# Altium PCB control_plane.PcbDoc
Units mil, origin at the board's own origin, x right, y up, seen from the top; angles counter-clockwise.
Board outline 3200 x 1597.36 mil, 4 copper layers (Top Layer, GND, VCC_3.3_MAIN, Bottom Layer), stack 58 mil thick; 101 components, 96 nets, 426 pads, 198 vias.
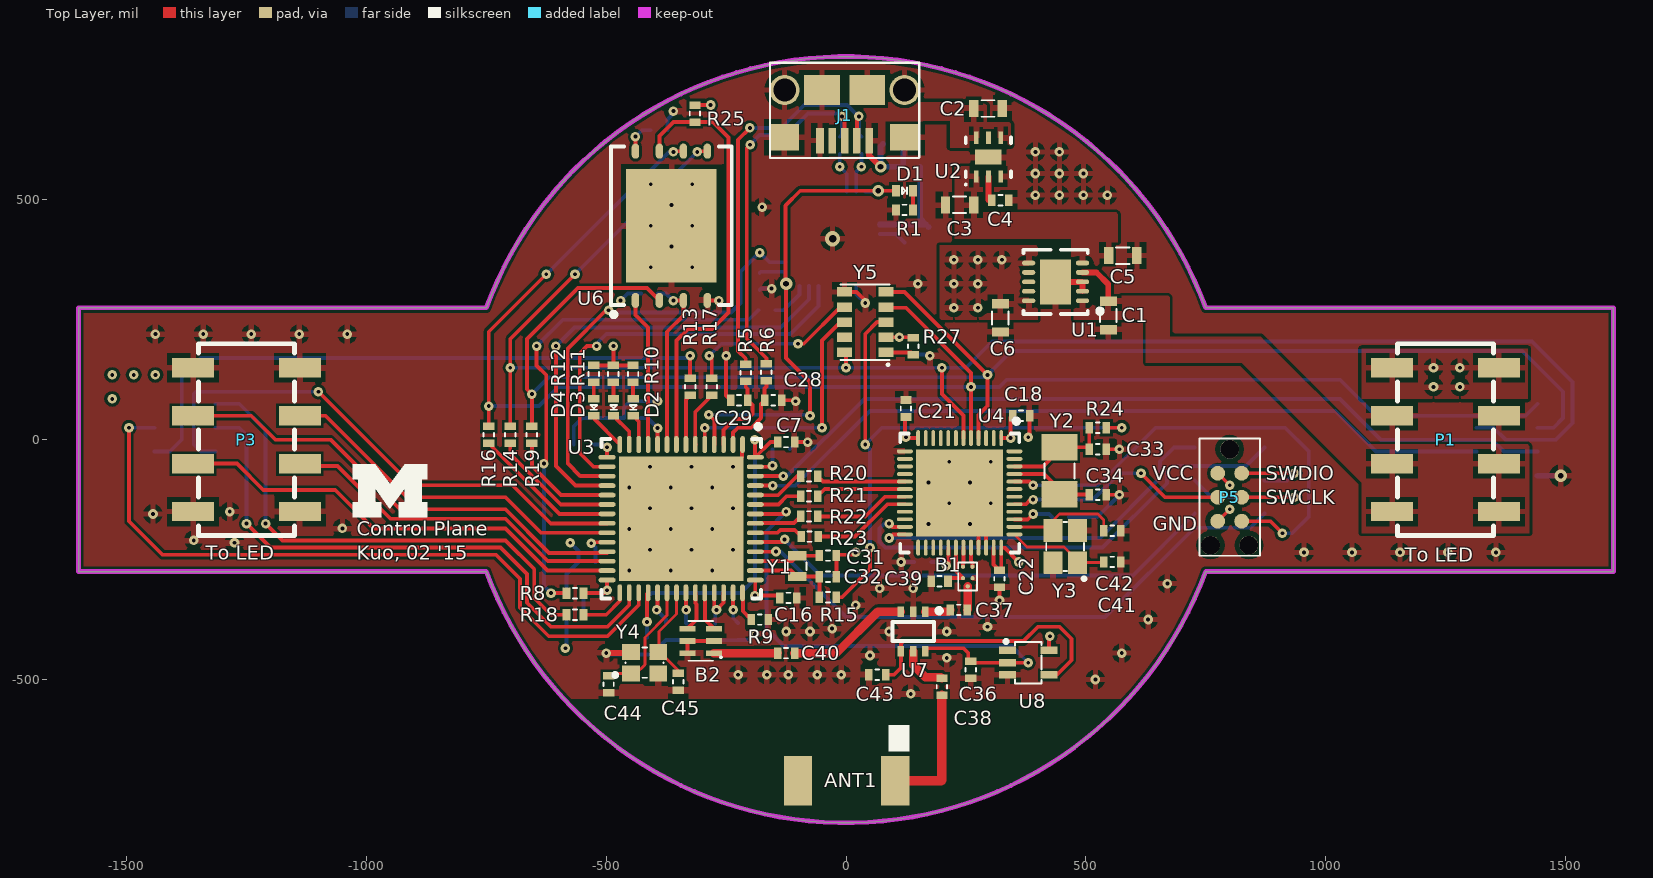
[diagram p0: Top Layer view]
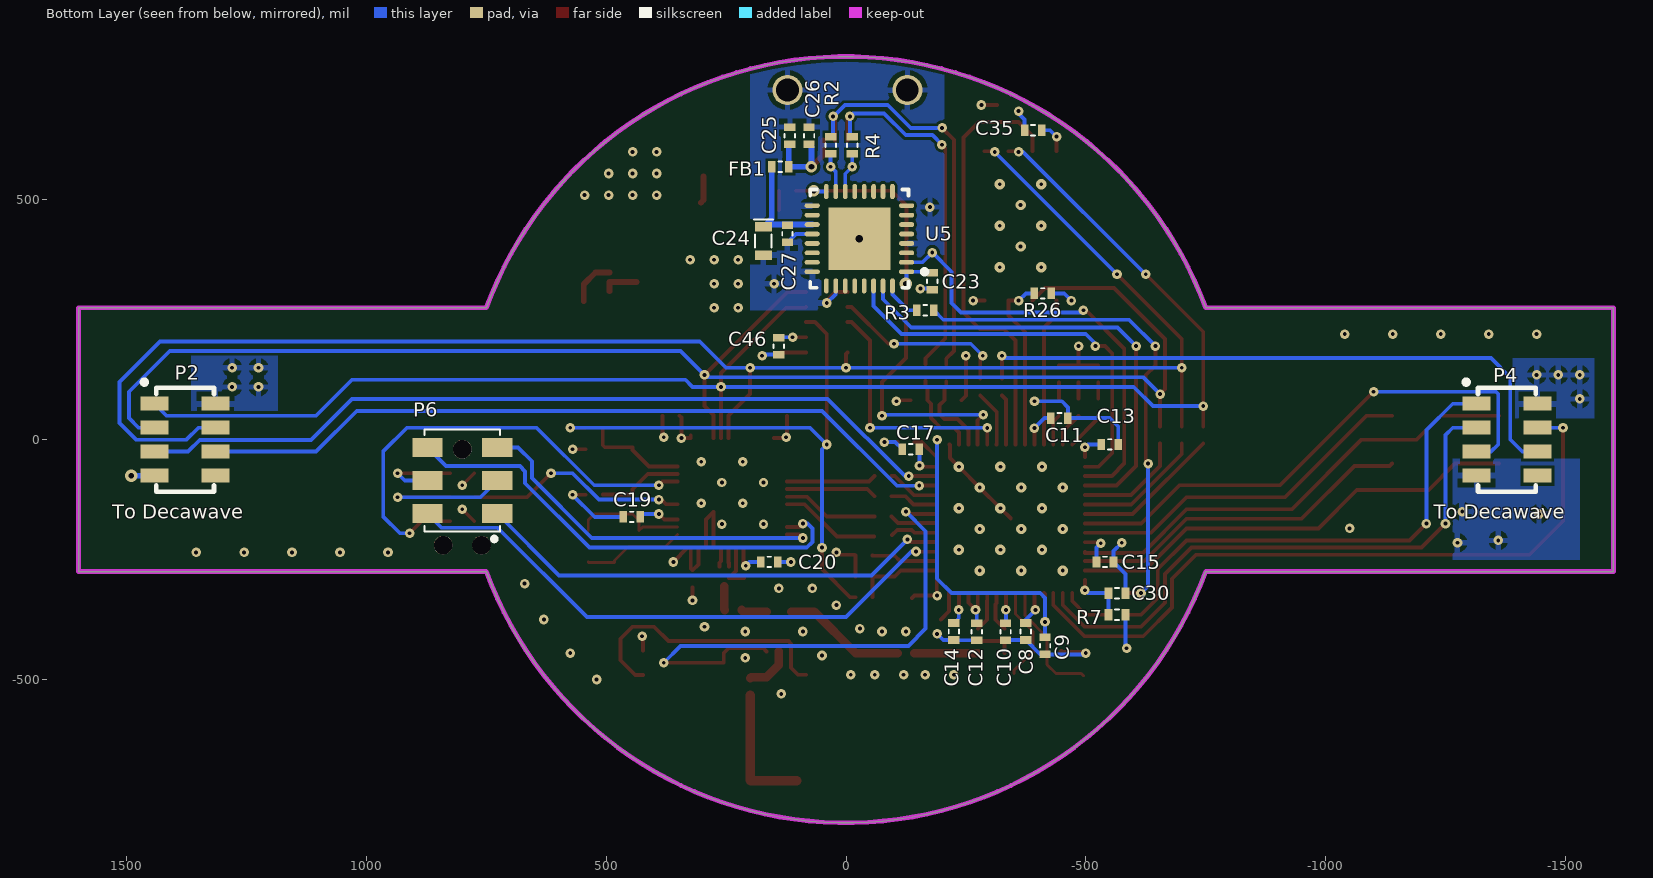
[diagram p1: Bottom Layer view, seen from below]
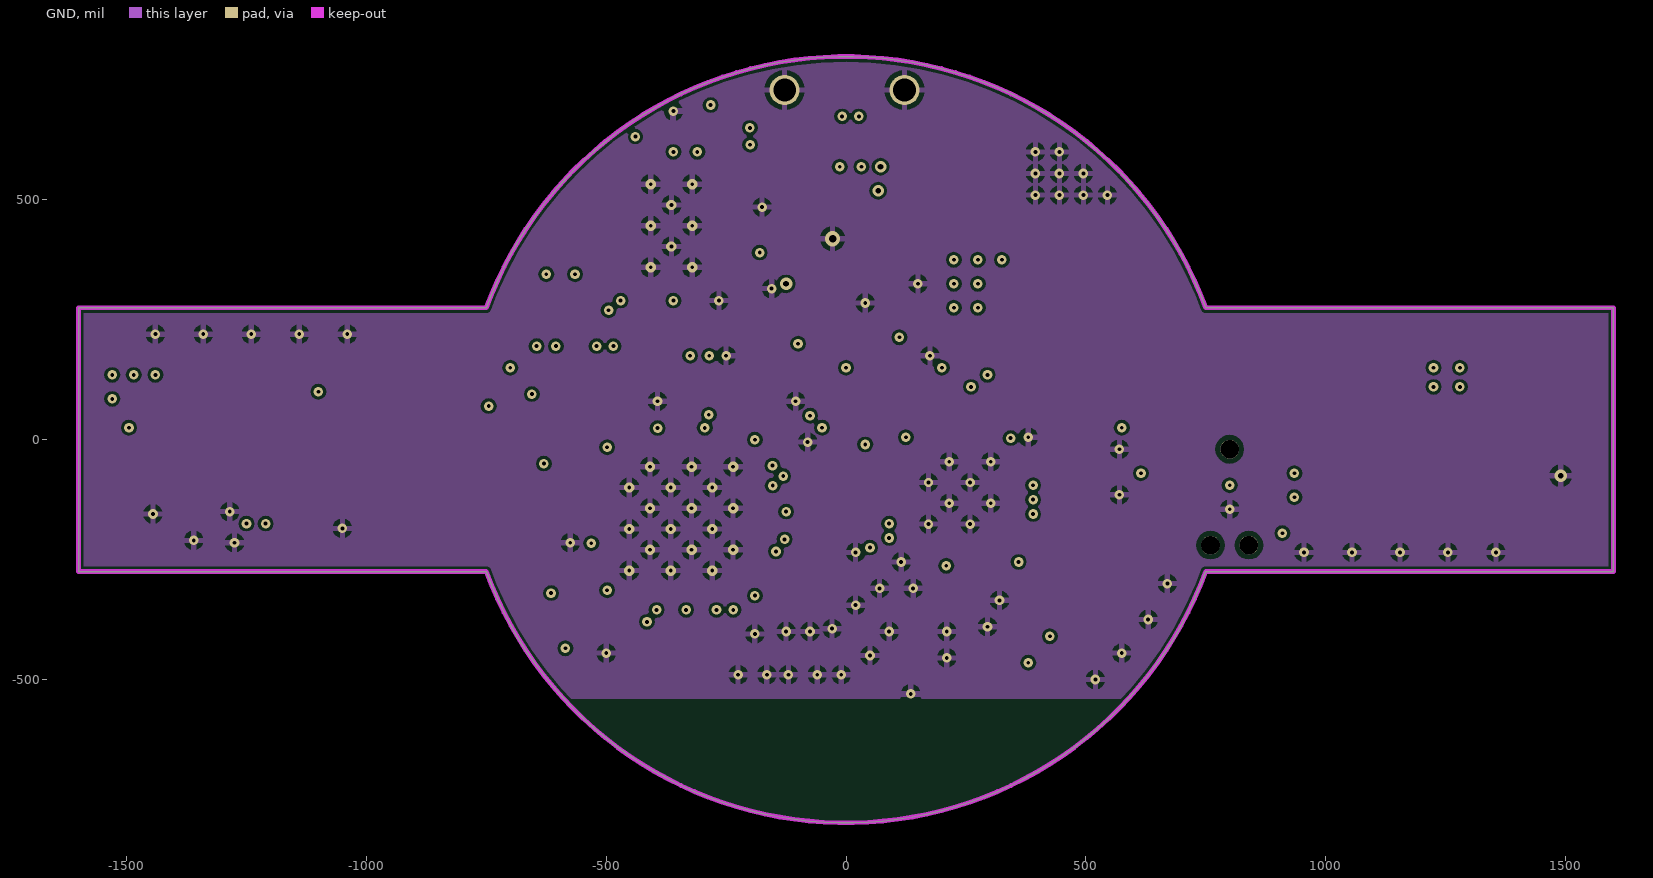
[diagram p2: GND]
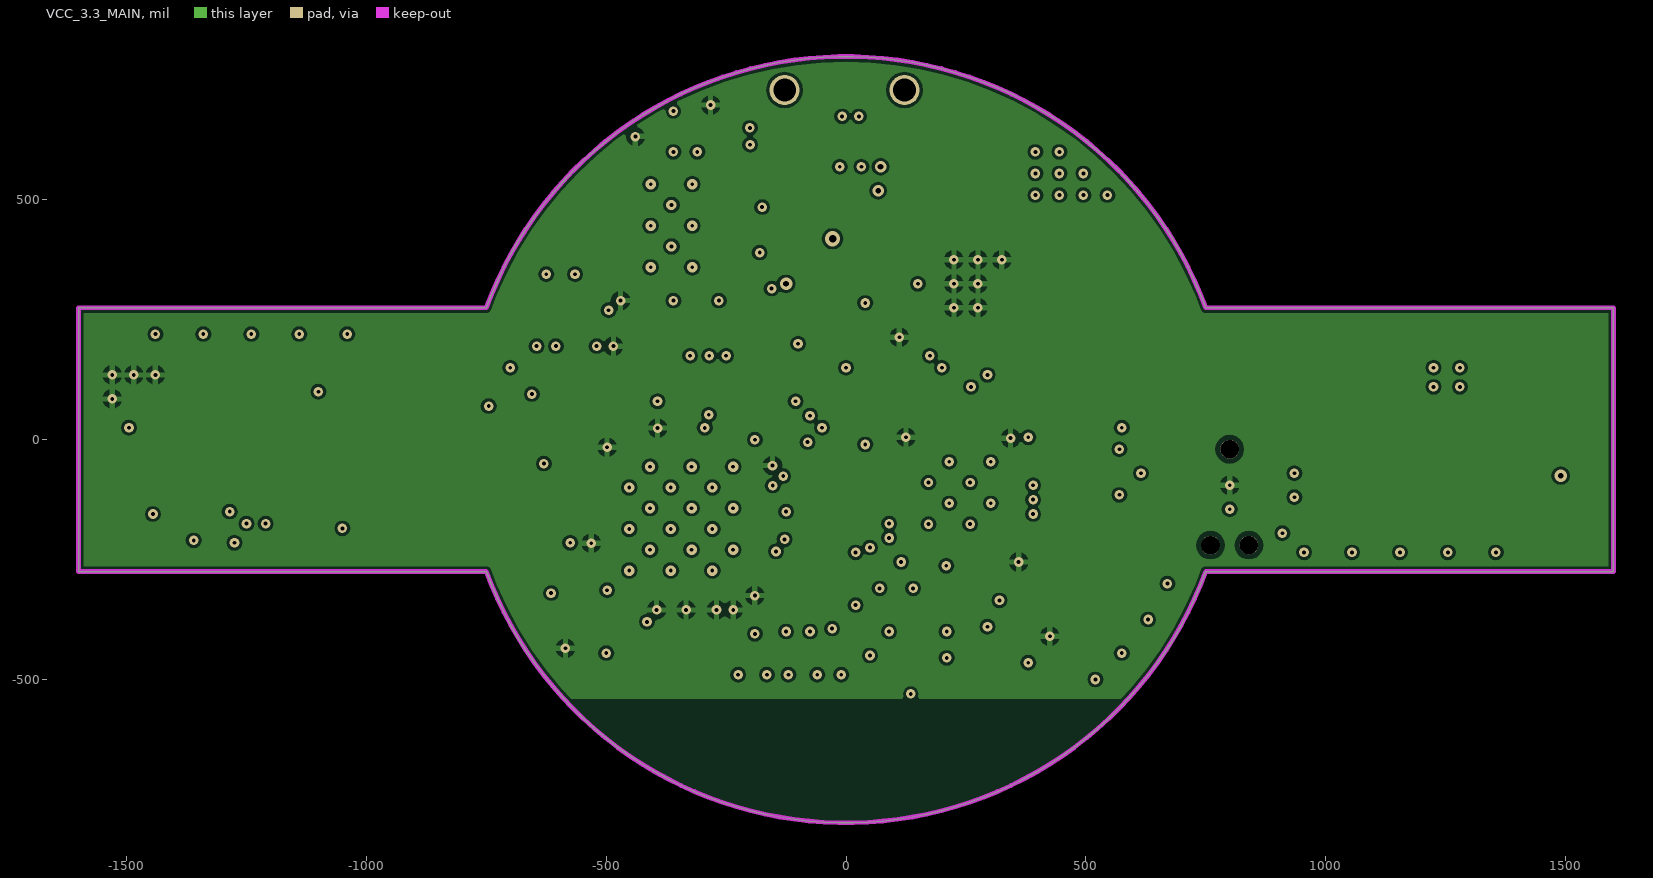
[diagram p3: VCC_3.3_MAIN]

## Layer stack, top to bottom
Top Solder: solder mask 0.4, Solder Resist, Dk 3.5
Top Layer: signal copper 1.7
Dielectric 1: core 11.9, FR-4, Dk 4.5
GND: signal copper 1.4
Dielectric 2: prepreg 28, Dk 4.5
VCC_3.3_MAIN: signal copper 1.4
Dielectric 3: core 11.9, Dk 4.5
Bottom Layer: signal copper 1.7
Bottom Solder: solder mask 0.4, Solder Resist, Dk 3.5

## Board outline
-1600,-275 -1600,275 -750,275 cw(c0,0) 750,275 1600,275 1600,-275 750,-275 cw(c0,0) -750,-275

## Design rules (kind name [scope] priority, off if disabled: settings)
Clearance "Clearance~Sunstone Circuits" [All] p1: gap=6 // Sunstone Circuits Minimum Clearance Rule (MLB~4&6 Layer Designs)
DiffPairsRouting [All] p1: maxlimit=10 minlimit=10 mostfreqgap=10 toplayer_minwidth=8 toplayer_maxwidth=15 toplayer_prefwidth=15 midlayer1_minwidth=15 midlayer1_maxwidth=15 midlayer1_prefwidth=15 midlayer2_minwidth=15 midlayer2_maxwidth=15 midlayer2_prefwidth=15 bottomlayer_minwidth=8 bottomlayer_maxwidth=15 bottomlayer_prefwidth=15 maxuncoupledlength=500
HoleSize "HoleSize~Sunstone Circuits" [All] p1: absolutevalues=TRUE maxlimit=251 minlimit=8 maxpercent=80.000 minpercent=20.000 // Sunstone Circuits Hole Size Rule (MLB~4&6 Layer Designs)
HoleSize Testpoint [All] p2: absolutevalues=TRUE maxlimit=100 minlimit=1 maxpercent=80.000 minpercent=20.000
HoleSize TestPointUsage [All] p3: absolutevalues=TRUE maxlimit=100 minlimit=1 maxpercent=80.000 minpercent=20.000
MinimumAnnularRing "MinimumAnnularRing~Sunstone Circuits" [All] p1: minimumring=6 // Sunstone Circuits Minimum Annular Ring (MLB~4&6 Layer Designs)
MinimumSolderMaskSliver [All] p1 off: minsoldermaskwidth=10
PlaneClearance "PlaneClearance~Sunstone Circuits" [All] p1: clearance=12 // Sunstone Circuits Power Plane Clearance Rule (MLB~4&6 Layer Designs)
PlaneConnect "PlaneConnect~Sunstone Circuits" [All] p1: planeconnectstyle=Relief reliefexpansion=10 reliefentries=4 reliefconductorwidth=8 reliefairgap=10 // Sunstone Circuits Power Plane Connect Rule (MLB~4&6 Layer Designs)
PolygonConnect "PolygonConnect~Sunstone Circuits" [All] p1: connectstyle=Relief reliefconductorwidth=12 reliefentries=4 polygonreliefangle="90 Angle" airgapwidth=10 // Sunstone Circuits Polygon Connect Style (MLB~4&6 Layer Designs)
RoomDefinition U_usb [InComponentClass('U_usb')] p1 off: confinementstyle=ConfineIn formatcopy=TRUE lockcomponents=FALSE outline -607.48,-393.7 -607.48,-291.3 -265.48,-291.3 -265.48,110.98 -237.7,110.98 -237.7,181.76 -208.7,181.76 -208.7,372.48 -183.67,372.48 -183.67,554.98 -174.42,554.98 -174.42,839 168.42,839 168.42,597.7 179.48,597.7 179.48,470.97 206.61,470.97 206.61,357.74 107.98,357.74 107.98,283.02 -109.52,283.02 -109.52,53.58 -137.52,53.58 -137.52,-403.7 -222.48,-403.7 -222.48,-393.7
RoomDefinition U_rtc [InComponentClass('U_rtc')] p2 off: confinementstyle=ConfineIn formatcopy=TRUE lockcomponents=FALSE outline -32.06,141.21 -32.06,335.71 112.05,335.71 112.05,237.48 168.7,237.48 168.7,152.52 112.05,152.52 112.05,141.21
RoomDefinition U_rf [InComponentClass('U_rf')] p3 off: confinementstyle=ConfineIn formatcopy=TRUE lockcomponents=FALSE outline -518.7,-552.48 -518.7,-467.52 -489.14,-467.52 -489.14,-408.74 -368.56,-408.74 -368.56,-357.49 79.8,-357.49 79.8,-330.94 152.52,-330.94 152.52,-266.3 222.19,-266.3 222.19,-244.17 398.72,-244.17 398.72,-152.91 515.28,-152.91 515.28,-161.3 597.48,-161.3 597.48,-283.7 515.28,-283.7 515.28,-306.9 456.93,-306.9 456.93,-524.21 228.7,-524.21 228.7,-557.48 152.06,-557.48 152.06,-782.1 -147.46,-782.1 -147.46,-552.48
RoomDefinition U_power [InComponentClass('U_power')] p4 off: confinementstyle=ConfineIn formatcopy=TRUE lockcomponents=FALSE outline -592.48,-38.7 -592.48,18.7 -536.72,18.7 -536.72,47.12 -487.48,47.12 -487.48,73.7 62.52,73.7 62.52,78.7 180.74,78.7 180.74,523.61 234.83,523.61 234.83,663.17 239.74,663.17 239.74,725.61 352.26,725.61 352.26,663.17 359.17,663.17 359.17,527.7 364.48,527.7 364.48,422.66 549.36,422.66 549.36,418.61 633.26,418.61 633.26,349.39 581.61,349.39 581.61,202.74 489.48,202.74 489.48,-189.7 388.73,-189.7 388.73,-262.73 348.7,-262.73 348.7,-332.48 -77.52,-332.48 -77.52,-358.7 -196.3,-358.7 -196.3,-442.48 -243.95,-442.48 -243.95,-443.13 -386.3,-443.13 -386.3,-472.48 -443.7,-472.48 -443.7,-357.72 -536.72,-357.72 -536.72,-283.7 -582.48,-283.7 -582.48,-38.7
RoomDefinition U_flash [InComponentClass('U_flash')] p5 off: confinementstyle=ConfineIn formatcopy=TRUE lockcomponents=FALSE outline -517.7,241.12 -517.7,639.07 -432.48,639.07 -432.48,673.7 -343.7,673.7 -343.7,722.48 -286.3,722.48 -286.3,639.07 -210.3,639.07 -210.3,241.12
RoomDefinition U_digital_IO [InComponentClass('U_digital_IO')] p6 off: confinementstyle=ConfineIn formatcopy=TRUE lockcomponents=FALSE outline -773.7,-32.48 -773.7,52.48 -554.7,52.48 -554.7,179.48 -415.3,179.48 -415.3,152.48 -251.3,152.48 -251.3,53.7 567.48,53.7 567.48,-143.7 495.4,-143.7 495.4,-154.77 4.83,-154.77 4.83,-357.35 -522.52,-357.35 -522.52,-393.7 -607.48,-393.7 -607.48,-32.48
RoomDefinition U_connector [InComponentClass('U_connector')] p7 off: confinementstyle=ConfineIn formatcopy=TRUE lockcomponents=FALSE outline -1483.52,-123.46 -1483.52,139.84 -1417.92,139.84 -1417.92,215 1417.92,215 1417.92,139.84 1483.52,139.84 1483.52,-123.46 1417.92,-123.46 1417.92,-215 917.33,-215 917.33,-225.98 874.96,-225.98 874.96,-254.02 725.04,-254.02 725.04,-225.98 682.67,-225.98 682.67,-215 -1417.92,-215 -1417.92,-123.46
RoutingVias "RoutingVias~Sunstone Circuits" [All] p1: holewidth=16 width=30 viastyle="Through Hole" minholewidth=8 minwidth=20 maxholewidth=20 maxwidth=40 // Sunstone Circuits Routing Vias Rule (MLB~4&6 Layer Designs)
ShortCircuit "ShortCircuit~Sunstone Circuits" [All] p1: allowed=FALSE // Sunstone Circuits Short Circuit Rule~Do Not Allow (MLB~4&6 Layer Designs)
SilkToSilkClearance [All] p1 off: silktosilkclearance=10
SilkToSolderMaskClearance [IsPad] p1 off: minsilkscreentomaskgap=10 clearancetoexposedcopper=TRUE
SolderMaskExpansion tentVias [isVia] p1: expansion=-20 // Sunstone Circuits Solder Mask Expansion Rule (MLB~4&6 Layer Designs)
SolderMaskExpansion "SolderMaskExpansion~Sunstone Circuits" [All] p2: expansion=3 // Sunstone Circuits Solder Mask Expansion Rule (MLB~4&6 Layer Designs)
ViasUnderSMD "ViasUnderSMD~Sunstone Circuits" [All] p1: allowed=FALSE // Sunstone Circuits Vias Under SMD~Do Not Allow (MLB~4&6 Layer Designs)
Width "Width~Sunstone Circuits" [All] p1: maxlimit=100 minlimit=6 preferedwidth=10 // Sunstone Circuits Minimum Width Rule (MLB~4&6 Layer Designs)
22 further rules are at their usual default settings.

## Classes and differential pairs
component class U_connector: P1 P2 P3 P4 P5 P6
component class U_digital_IO: C31 C32 C33 C34 D2 D3 D4 R10 R11 R12 R13 R14 R15 R16 R17 R18 R19 R20 R21 R22 R23 R24 Y1 Y2
component class U_flash: C35 R25 R26 U6
component class U_power: C1 C2 C3 C4 C5 C6 C7 C8 C9 C10 C11 C12 C13 C14 C15 C16 C17 C18 C19 C20 C21 C22 U1 U2 U3 U4
component class U_rf: ANT1 B1 B2 C36 C37 C38 C39 C40 C41 C42 C43 C44 C45 U7 U8 Y3 Y4
component class U_rtc: C46 R27 Y5
component class U_usb: C23 C24 C25 C26 C27 C28 C29 C30 D1 FB1 J1 R1 R2 R3 R4 R5 R6 R7 R8 R9 U5
differential pair CC2538_RF: +CC2538_RF_P -CC2538_RF_N
differential pair NRF51822_RF: +NRF51822_RF_P -NRF51822_RF_N
differential pair USB_FTDI: +USB_FTDI_P -USB_FTDI_N
differential pair USB_MCU: +USB_MCU_P -USB_MCU_N
differential pair USB: +USB_P -USB_N

## Components (designator, comment, footprint, x,y, rotation, side; value= is the part's Value field where it differs from the comment)
ANT1 "Ground Antenna" "Chip Antenna" 21,-716 r180 top
B1 "BAL-NRF01D3" BAL-NRF01D3 244,-265 r270 top
B2 "2450BM15A0002E" 2450BM15A0002 -302.65,-419.65 r180 top
C1 "Ceramic capacitor" 0603 547,259 r270 top
C2 "Ceramic capacitor" 0603 296,691 r0 top
C3 "Ceramic capacitor" 0603 237,489 r180 top
C4 "Ceramic capacitor" 0402 322,499 r0 top
C5 "Ceramic capacitor" 0603 577,384 r0 top
C6 "Ceramic capacitor" 0603 322,254 r270 top
C7 "Ceramic capacitor" 0402 -125,-5 r0 top
C8 "Ceramic capacitor" 0402 -375,-400 r270 bottom
C9 "Ceramic capacitor" 0402 -415,-430 r270 bottom
C10 "Ceramic capacitor" 0402 -332.65,-400.65 r270 bottom
C11 "Ceramic capacitor" 0402 -445,45 r180 bottom
C12 "Ceramic capacitor" 0402 -272.65,-400.65 r270 bottom
C13 "Ceramic capacitor" 0402 -550,-10 r180 bottom
C14 "Ceramic capacitor" 0402 -225,-400 r270 bottom
C15 "Ceramic capacitor" 0402 -540,-255 r180 bottom
C16 "Ceramic capacitor" 0402 -120,-330 r0 top
C17 "Ceramic capacitor" 0402 -135,-20 r0 bottom
C18 "Ceramic capacitor" 0402 365,50 r0 top
C19 "Ceramic capacitor" 0402 447,-161 r0 bottom
C20 "Ceramic capacitor" 0402 160,-255 r180 bottom
C21 "Ceramic capacitor" 0402 125,65 r90 top
C22 "Ceramic capacitor" 0402 320,-290 r270 top
C23 "Ceramic capacitor" 0402 -180,330 r270 bottom
C24 "Tantalum capacitor" "0603 - Polar Marking" 172,414 r270 bottom
C25 "Ceramic capacitor" 0402 117,634 r90 bottom
C26 "Ceramic capacitor" 0402 77,634 r90 bottom
C27 "Ceramic capacitor" 0402 122,429 r270 bottom
C28 "Ceramic capacitor" 0402 -152,82.28 r0 top
C29 "Ceramic capacitor" 0402 -223,82.28 r180 top
C30 "Ceramic capacitor" 0402 -565,-320 r180 bottom
C31 "Ceramic capacitor" 0402 -37.65,-241.65 r0 top
C32 "Ceramic capacitor" 0402 -37.65,-285.65 r0 top
C33 "Ceramic capacitor" 0402 525,-20 r0 top
C34 "Ceramic capacitor" 0402 525,-115 r0 top
C35 "Ceramic capacitor" 0402 -390,645 r0 bottom
C36 "Ceramic capacitor" 0402 260,-480 r90 top
C37 "Ceramic capacitor" 0402 235,-355 r180 top
C38 "Ceramic capacitor" 0402 200,-515 r270 top
C39 "Ceramic capacitor" 0402 195,-295 r180 top
C40 "Ceramic capacitor" 0402 -125,-445 r0 top
C41 "Ceramic capacitor" 0402 555,-255 r180 top
C42 "Ceramic capacitor" 0402 555,-190 r180 top
C43 "Ceramic capacitor" 0402 65,-490 r180 top
C44 "Ceramic capacitor" 0402 -495,-510 r90 top
C45 "Ceramic capacitor" 0402 -350,-505 r90 top
C46 "Ceramic capacitor" 0402 140,195 r270 bottom
D1 "LED, Green" "0402 - DIODE" 122,519 r0 top
D2 "LED, Orange" "0402 - DIODE" -443.65,67.35 r270 top
D3 "LED, Red" "0402 - DIODE" -484.65,67.35 r270 top
D4 "LED, Green" "0402 - DIODE" -525.65,67.35 r270 top
FB1 "Ferrite Bead" 0402 137,569 r180 bottom
J1 "micro USB-B" "Micro USB-B" -3,729 r180 top
P1 "SSM-104-F-DV" SSM-104-F-DV 1250,0 r270 top locked
P2 "CLP Header" SAM_CLP_2_4 1378,0 r180 bottom
P3 "SSM-104-F-DV" SSM-104-F-DV -1250,0 r270 top locked
P4 "CLP Header" SAM_CLP_2_4 -1378,0 r180 bottom locked
P5 "TC2030" TC2030-IDC-NLFP 800,-120 r270 top
P6 "CAS-220" CAS-220A 800,-85 r90 bottom
R1 "Chip resistor" 0402 122,479 r180 top
R2 "Chip resistor" 0402 32,614 r90 bottom
R3 "Chip resistor" 0402 -165,270 r180 bottom
R4 "Chip resistor" 0402 -13,614 r90 bottom
R5 "Chip resistor" 0402 -209,139.28 r270 top
R6 "Chip resistor" 0402 -166,140.28 r270 top
R7 "Chip resistor" 0402 -565,-365 r0 bottom
R8 "Chip resistor" 0402 -565,-320 r180 top
R9 "Chip resistor" 0402 -180,-375 r0 top
R10 "Chip resistor" 0402 -444,137 r270 top
R11 "Chip resistor" 0402 -485,137 r270 top
R12 "Chip resistor" 0402 -526,137 r270 top
R13 "Chip resistor" 0402 -325,110 r270 top
R14 "Chip resistor" 0402 -700,10 r270 top
R15 "Chip resistor" 0402 -37.65,-328.65 r0 top
R16 "Chip resistor" 0402 -745,10 r270 top
R17 "Chip resistor" 0402 -280,110 r270 top
R18 "Chip resistor" 0402 -565,-365 r180 top
R19 "Chip resistor" 0402 -655,10 r270 top
R20 "Chip resistor" 0402 -77,-76 r0 top
R21 "Chip resistor" 0402 -77,-118 r0 top
R22 "Chip resistor" 0402 -77,-160 r0 top
R23 "Chip resistor" 0402 -76,-202 r0 top
R24 "Chip resistor" 0402 525,25 r0 top
R25 "Chip resistor" 0402 -315,680 r270 top
R26 "Chip resistor" 0402 -410,305 r0 bottom
R27 "Chip resistor" 0402 140,195 r270 top
U1 "LTC4413" DFN-10 437,329 r180 top
U2 "TPS73533" SON-6 297,589 r90 top
U3 "CC2538" QFN56 -343.65,-164.65 r270 top
U4 "nRF51822" QFN-48 237,-111 r270 top
U5 "FT232RQ" QFN-32 -28,419 r0 bottom
U6 "SST25VF064C" WSON -364,446 r90 top
U7 "uPG2214TB" minimold-6 140,-400 r270 top
U8 "SN74AUP1T14" "SC-70-5 (DCK)" 380,-465 r270 top
Y1 "ABS05" ABS05 -101.65,-263.65 r90 top
Y2 "ECX-31B" ECX-31B 445,-65 r90 top
Y3 "CSX2520" CX2520 457,-223 r90 top
Y4 "FA-128" FA-128 -420,-465 r0 top
Y5 "RV-3049-C3" RV-3049-C3 40,245 r90 top

## Footprints (in the part's own frame and the unit in brackets; to place one, negate y for a bottom-side part, rotate by r counter-clockwise, add the part's x,y. Pads: shape width x height; smd on the part's side, far side on the other; paste and mask are expansions set on the pad)
0402 [mm] "2-Leads, Body 1.00x0.50mm, IPC Medium Density"
  rect 0.4x0.6 smd: 1(-0.45,0) 2(0.45,0)
  silkscreen extent -0.1,-0.28 0.1,0.28, body extent -0.53,-0.28 0.53,0.27, height 0.4
"0402 - DIODE" [mm] "2-Leads, Body 1.00x0.50mm, IPC Medium Density"
  rect 0.4x0.6 smd: 1(-0.45,0) 2(0.45,0)
  silkscreen extent -0.13,-0.18 0.13,0.18, body extent -0.53,-0.28 0.53,0.27, height 0.4
0603 [mm] "2-Leads, Body 1.55x0.85mm, IPC Medium Density"
  rect 0.5x0.9 smd: 1(-0.75,0) 2(0.75,0)
  silkscreen extent -0.35,-0.45 0.35,0.43, body extent -0.75,-0.42 0.75,0.43, height 0.5
"0603 - Polar Marking" [mm] "2-Leads, Body 1.55x0.85mm, IPC Medium Density"
  rect 0.5x0.9 smd: 1(-0.75,0) 2(0.75,0)
  silkscreen extent -1.14,-0.51 0.35,0.51, body extent -0.75,-0.42 0.75,0.43, height 0.5
2450BM15A0002 [mm] "Chip Array, Flat, 6-Leads, Pitch 0.65mm,  Body 2.00x1.25mm,  IPC Medium Density"
  rect 0.85x0.3 smd: 1(-0.7,0.65) 2(-0.7,0) 3(-0.7,-0.65) 4(0.7,-0.65) 5(0.7,0) 6(0.7,0.65)
  silkscreen extent -1.11,-1.05 0.65,1.05, body extent -0.67,-1.05 0.67,1.05, height 0.81
ABS05 [mm] "ABS05 Crystal"
  rect 0.5x1 smd: 1(-0.55,0) 2(0.55,0)
  silkscreen extent -0.2,-0.5 0.2,0.5, body extent -0.8,-0.5 0.8,0.5, height 0.5
BAL-NRF01D3 [mm] "ST electronic balun"
  round 0.22 smd mask+0.05: A2(0.6,0.5) A3(0,0.5) B1(1.033,0.25) C2(0.6,0) C3(0,0)
  silkscreen extent -0.23,-0.25 1.25,0.75, body extent -0.23,-0.25 1.25,0.75, height 0.63
CAS-220A [mm] "CAS-220A"
  rect 1x1.6 smd: 1(-1.75,-1.85) 2(0,-1.85) 3(1.75,-1.85) 4(1.75,1.85) 5(0,1.85) 6(-1.75,1.85)
  silkscreen extent -3.2,-2 2.7,2, body extent -2.7,-2 2.7,2, height 2.5
"Chip Antenna" [mm] "FR05-S1-N-0-102"
  rect 1.5x2.6 smd: 1(-2.075,-0.125) ""(3.075,-0.125)
  silkscreen extent -2.83,-3.08 -1.73,-1.68, body extent -3.03,-1.63 3.98,1.38, height 2.2
CX2520 [mm] "Kyocera CX2520 crystal"
  rect 1.2x1 smd: 1(-0.85,-0.65) 2(0.85,-0.65) 3(0.85,0.65) 4(-0.85,0.65)
  silkscreen extent -1.75,-1.05 1.3,1, body extent -1.3,-1 1.3,1, height 0.5
DFN-10 [mm] "QFN, 10-Leads, Body 3.00x3.00mm, Pitch 0.50mm, Thermal Pad 1.65x2.38mm, IPC Medium Density"
  oval 0.7x0.25 smd: 1(-1.425,1) 2(-1.425,0.5) 3(-1.425,0) 4(-1.425,-0.5) 5(-1.425,-1) 6(1.425,-1) 7(1.425,-0.5) 8(1.425,0) 9(1.425,0.5) 10(1.425,1)
  rect 1.65x2.38 smd: 11(0,0)
  silkscreen extent -2.48,-1.7 1.7,1.7, body extent -1.55,-1.55 1.55,1.55, height 0.75
ECX-31B [mm] "ECX-31B"
  rect 1.4x1.9 smd: 1(-1.25,0) 2(1.25,0)
  silkscreen extent -0.4,-0.8 0.4,0.8, body extent -1.6,-0.8 1.6,0.8, height 0.9
FA-128 [mm] "Seiko Epson FA-128 Crystal"
  rect 0.95x0.85 smd: 1(-0.725,-0.575) 2(0.725,-0.575) 3(0.725,0.575) 4(-0.725,0.575)
  silkscreen extent -1.63,-0.8 1,0.8, body extent -1,-0.8 1,0.8, height 0.5
"Micro USB-B" [mm]
  rect 0.4x1.35 smd mask+0.1: 1(-1.3,2.675) 2(-0.65,2.675) 3(0,2.675) 4(0.65,2.675) 5(1.3,2.675)
  rect 1.6x1.4 smd mask+0.1: 6(-3.2,2.5) 6(3.2,2.5)
  round 1.6 hole 1.2: 6(-3.175,0) 6(3.175,0)
  rect 1.9x1.6 smd mask+0.1: 6(-1.2,0) 6(1.2,0)
  silkscreen extent -3.95,-1.45 3.95,3.6, body extent -4.1,-2.54 4.1,2.89, height 2.68
minimold-6 [mm] "SOTFL, 6-Leads, Body 2.00x2.10mm, Pitch 0.65mm, IPC Medium Density"
  rect 0.55x0.35 smd: 1(-1.05,0.65) 2(-1.05,0) 3(-1.05,-0.65) 4(1.05,-0.65) 5(1.05,0) 6(1.05,0.65)
  silkscreen extent -1.22,-1.1 0.5,1.5, body extent -0.67,-1.1 0.67,1.1, height 1
QFN56 [mm] "QFN, 56-Leads, Body 8.00x8.00mm, Pitch 0.50mm, Thermal Pad 6.60x6.60mm, IPC Medium Density"
  oval 0.9x0.25 smd: 1(-3.925,3.25) 2(-3.925,2.75) 3(-3.925,2.25) 4(-3.925,1.75) 5(-3.925,1.25) 6(-3.925,0.75) 7(-3.925,0.25) 8(-3.925,-0.25) 9(-3.925,-0.75) 10(-3.925,-1.25) 11(-3.925,-1.75) 12(-3.925,-2.25) 13(-3.925,-2.75) 14(-3.925,-3.25) 29(3.925,-3.25) 30(3.925,-2.75) 31(3.925,-2.25) 32(3.925,-1.75) 33(3.925,-1.25) 34(3.925,-0.75) 35(3.925,-0.25) 36(3.925,0.25) 37(3.925,0.75) 38(3.925,1.25) 39(3.925,1.75) 40(3.925,2.25) 41(3.925,2.75) 42(3.925,3.25)
  oval 0.25x0.9 smd: 15(-3.25,-3.925) 16(-2.75,-3.925) 17(-2.25,-3.925) 18(-1.75,-3.925) 19(-1.25,-3.925) 20(-0.75,-3.925) 21(-0.25,-3.925) 22(0.25,-3.925) 23(0.75,-3.925) 24(1.25,-3.925) 25(1.75,-3.925) 26(2.25,-3.925) 27(2.75,-3.925) 28(3.25,-3.925) 43(3.25,3.925) 44(2.75,3.925) 45(2.25,3.925) 46(1.75,3.925) 47(1.25,3.925) 48(0.75,3.925) 49(0.25,3.925) 50(-0.25,3.925) 51(-0.75,3.925) 52(-1.25,3.925) 53(-1.75,3.925) 54(-2.25,3.925) 55(-2.75,3.925) 56(-3.25,3.925)
  rect 6.6x6.6 smd: 57(0,0)
  silkscreen extent -5,-4.22 4.22,4.23, body extent -4.08,-4.07 4.07,4.08, height 1
QFN-32 [mm] "32-Pin QFN 0.5 mm Pitch"
  oval 0.8x0.25 smd: 1(-2.5,1.75) 2(-2.5,1.25) 3(-2.5,0.75) 4(-2.5,0.25) 5(-2.5,-0.25) 6(-2.5,-0.75) 7(-2.5,-1.25) 8(-2.5,-1.75) 17(2.5,-1.75) 18(2.5,-1.25) 19(2.5,-0.75) 20(2.5,-0.25) 21(2.5,0.25) 22(2.5,0.75) 23(2.5,1.25) 24(2.5,1.75)
  oval 0.25x0.8 smd: 9(-1.75,-2.5) 10(-1.25,-2.5) 11(-0.75,-2.5) 12(-0.25,-2.5) 13(0.25,-2.5) 14(0.75,-2.5) 15(1.25,-2.5) 16(1.75,-2.5) 25(1.75,2.5) 26(1.25,2.5) 27(0.75,2.5) 28(0.25,2.5) 29(-0.25,2.5) 30(-0.75,2.5) 31(-1.25,2.5) 32(-1.75,2.5)
  rect 3.3x3.3 smd: 33(0,0)
  silkscreen extent -3.57,-2.6 2.6,2.6, body extent -2.58,-2.58 2.58,2.58, height 0.8
QFN-48 [mm] "QFN, 48-Leads, Body 6.00x6.00mm, Pitch 0.40mm, Thermal Pad 4.60x4.60mm, IPC Medium Density"
  oval 0.85x0.2 smd: 1(-2.9,2.2) 2(-2.9,1.8) 3(-2.9,1.4) 4(-2.9,1) 5(-2.9,0.6) 6(-2.9,0.2) 7(-2.9,-0.2) 8(-2.9,-0.6) 9(-2.9,-1) 10(-2.9,-1.4) 11(-2.9,-1.8) 12(-2.9,-2.2) 25(2.9,-2.2) 26(2.9,-1.8) 27(2.9,-1.4) 28(2.9,-1) 29(2.9,-0.6) 30(2.9,-0.2) 31(2.9,0.2) 32(2.9,0.6) 33(2.9,1) 34(2.9,1.4) 35(2.9,1.8) 36(2.9,2.2)
  oval 0.2x0.85 smd: 13(-2.2,-2.9) 14(-1.8,-2.9) 15(-1.4,-2.9) 16(-1,-2.9) 17(-0.6,-2.9) 18(-0.2,-2.9) 19(0.2,-2.9) 20(0.6,-2.9) 21(1,-2.9) 22(1.4,-2.9) 23(1.8,-2.9) 24(2.2,-2.9) 37(2.2,2.9) 38(1.8,2.9) 39(1.4,2.9) 40(1,2.9) 41(0.6,2.9) 42(0.2,2.9) 43(-0.2,2.9) 44(-0.6,2.9) 45(-1,2.9) 46(-1.4,2.9) 47(-1.8,2.9) 48(-2.2,2.9)
  rect 4.6x4.6 smd: 49(0,0)
  silkscreen extent -3.92,-3.15 3.15,3.15, body extent -3,-3 3,3, height 0.9
RV-3049-C3 [mm] "RV-3049-C3"
  rect 0.5x0.8 smd: 1(-1.6,-1.1) 2(-0.8,-1.1) 3(0,-1.1) 4(0.8,-1.1) 5(1.6,-1.1) 6(1.6,1.1) 7(0.8,1.1) 8(0,1.1) 9(-0.8,1.1) 10(-1.6,1.1)
  silkscreen extent -2.26,-1.3 2,1.3, body extent -1.9,-1.3 1.9,1.3, height 0.9
SAM_CLP_2_4 [mm]
  rect 1.47x0.74 smd: 1(-1.615,1.905) 2(1.615,1.905) 3(-1.615,0.635) 4(1.615,0.635) 5(-1.615,-0.635) 6(1.615,-0.635) 7(-1.615,-1.905) 8(1.615,-1.905)
  silkscreen extent -2.28,-2.76 1.53,3.17, body extent -1.53,-2.76 1.53,2.76, height 2.29
"SC-70-5 (DCK)" [mm]
  rect 0.4x0.9 smd mask+0.05: 1(-0.65,-1.1) 2(0,-1.1) 3(0.65,-1.1) 4(0.65,1.1) 5(-0.65,1.1)
  silkscreen extent -1.18,-1.23 1.1,0.7, body extent -1.1,-0.7 1.1,0.7, height 1.1
SON-6 [mm] "SON, 6-Leads, Body 2.00x2.00mm, Pitch 0.65mm, Thermal Pad 1.60x0.89mm, IPC Medium Density"
  rect 0.65x0.25 smd: 1(-1.025,0.65) 2(-1.025,0) 3(-1.025,-0.65) 4(1.025,-0.65) 5(1.025,0) 6(1.025,0.65)
  rect 0.8x1.4 smd: 7(0,0)
  silkscreen extent -1.5,-1.2 1.05,1.25, body extent -1.05,-1.05 1.05,1.05, height 0.8
SSM-104-F-DV [mm] "Samtec 100 mil 2x4 female connector"
  rect 1.02x2.22 smd: 1(-3.81,-2.825) 2(-3.81,2.825) 3(-1.27,-2.825) 4(-1.27,2.825) 5(1.27,-2.825) 6(1.27,2.825) 7(3.81,-2.825) 8(3.81,2.825)
  silkscreen extent -5.08,-2.54 5.08,2.54, body extent -5.08,-2.54 5.08,2.54, height 7.37
TC2030-IDC-NLFP [mil]
  round 39 hole 39 unplated: 0(-100,0) 0(100,40) 0(100,-40)
  round 31 smd paste-196.85: 1(-50,-25) 2(-50,25) 3(0,-25) 4(0,25) 5(50,-25) 6(50,25)
  Top Layer pour cut-out: -50,25 -50,-25 50,-25 50,25
  silkscreen extent -122,-63 122,63
WSON [mm] "QFN, 8-Leads, Body 8.00x6.00mm, Pitch 1.27mm, Thermal Pad 6.00x4.80mm, IPC Medium Density"
  oval 0.8x0.4 smd: 1(-3.95,1.905) 2(-3.95,0.635) 3(-3.95,-0.635) 4(-3.95,-1.905) 5(3.95,-1.905) 6(3.95,-0.635) 7(3.95,0.635) 8(3.95,1.905)
  rect 6x4.8 smd: 9(0,0)
  silkscreen extent -4.82,-3.2 4.2,3.2, body extent -4.05,-3.05 4.05,3.05, height 0.8

## Part data
ANT1: "2.4GHz Surface Mount Device (SMD) On Ground Antenna, 50 Ohms"
B1: "50 ohm nominal input / conjugate match balun to nRF51822-CEAA"
B2: "2.45 GHz Balun for TI CC253X"
C1 C3 C5: library part C_4.7u_10V_0603_ceramic, "Ceramic capacitor, 4.7u, 10V, 0603 package"
C2: library part C_1u_16V_0603_ceramic, "Ceramic capacitor, 1 uF, 16 V, 0603 package"
C4: library part C_10000p_16V_0402_ceramic, "Ceramic capacitor, 10000 pF, 16 V, 0402 package"
C6: library part C_10u_16V_0603_ceramic, "Ceramic capacitor, 10 uF, 16 V, 0603 package"
C7 C9 C17 C25: library part C_1u_16V_0402_ceramic, "Ceramic capacitor, 1 uF, 16V, 0402 package"
C8 C10 C11 C12 C13 C15 C16 C18 C19 C21 C23 C26 C27 C35 C46: library part C_0.1u_10V_0402_ceramic, "Ceramic capacitor, 0.1u, 0402 package"
C14: library part C_220p_50V_0402_ceramic, "Ceramic capacitor, 220 pF, 0402 package"
C20: library part C_0.047u_16V_0402_ceramic, "Ceramic capacitor, 0.047u, 16V, 0402 package"
C22 C30 C36 C43: library part C_1000p_50V_0402_ceramic, "Ceramic capacitor, 1000 pF, 0402 package"
C24: library part C_4.7u_10V_0603_tantalum, "Tantalum capacitor, 4.7 uF, 0603 package"
C28 C29: library part C_47p_0402_ceramic, "Ceramic capacitor, 47 pF, 0402 package"
C31 C32: library part C_22p_0402_ceramic, "Ceramic capacitor, 22 pF, 0402 package"
C33 C34: library part C_13p_0402_50V_ceramic, "Ceramic capacitor, 13 pF, 50 V, 0402 package"
C37 C38 C40: library part C_100p_25V_0402_ceramic, "Ceramic capacitor, 100 pF, 0402 package"
C39: library part C_2200p_50V_0402_ceramic, "Ceramic capacitor, 2200 pF, 0402 package"
C41 C42 C44 C45: library part C_12p_0402_ceramic, "Ceramic capacitor, 12 pF, 0402 package"
D1 D4: library part D_LED_GREEN_0402, "LED, Green,  0402"
D2: library part D_LED_ORANGE_0402, "LED, Orange, 0402"
D3: library part D_LED_RED_0402, "LED, Red, 0402"
FB1: library part FB_150mA_0402, "Ferrite Bead, 150 mA, 0402 package"
J1: library part "Micro USB", "CONN USB MICRO B RECPT SMT R/A"
P1 P3: "Samtec 2x4 100 mil female connector"
P2 P4: "Samtec CLP 2x4 0.05\" Female Header"
P5: "TC2030-MCP-NL"
P6: "DPDT dip switch"
R1 R12: library part R_205_0402, "Chip resistor, 205, 0402 package"
R2 R3 R4 R15 R24: library part R_0_0402, "Chip resistor, 0, 0402 package"
R5 R6: library part R_33_0402, "Chip resistor, 33, 0402 package"
R7 R25 R26: library part R_100K_0402, "Chip resistor, 100K, 0402 package"
R8: library part R_2.2K_0402, "Chip resistor, 2.2K, 0402 package"
R9: library part R_56K_0402, "Chip resistor, 56K, 0402 package"
R10: library part R_270_0402, "Chip resistor, 270, 0402 package"
R11: library part R_374_0402, "Chip resistor, 374, 0402 package"
R13 R14 R16 R17 R18 R19 R20 R21 R22 R23: library part R_100_0402, "Chip resistor, 100, 0402 package"
R27: library part R_10K_0402, "Chip resistor, 10K, 0402 package"
U1: "Dual 2.6A, 2.5V to 5.5V,  Ideal Diodes in 3mm × 3mm DFN"
U2: "500mA, Low Quiescent Current, Ultra-Low Noise, High PSRR  Low-Dropout Linear Regulator"
U3: "A Powerful System-On-Chip for 2.4-GHz IEEE 802.15.4, 6LoWPAN  and ZigBee Applications"
U4: "Multiprotocol Bluetooth® low energy/2.4 GHz RF System on Chip"
U5: "FT232R USB UART"
U6: "64 Mbit SPI Serial Dual I/O Flash"
U7: "GaAs Integrated Circuit for L, S-Band SPDT Switch"
U8: "LOW POWER, 1.8/2.5/3.3-V INPUT, 3.3-V CMOS OUTPUT, SINGLE  SCHMITT-TRIGGER INVERTER GATE"
Y1: "32768 Hz SMD Low profile crystal"
Y2: "SMD TUNING FORK CRYSTAL"
Y3: "Crystal oscillator"
Y4: "MHz Range Crystal Unit"
Y5: "Real Time Clock Module with SPI-Bus"

## Via types
v1: diameter 20, hole 8, Top Layer to Bottom Layer, 159 vias
v2: diameter 21.65, hole 7.87, Top Layer to Bottom Layer, 26 vias
v3: diameter 19.68, hole 7.87, Top Layer to Bottom Layer, 8 vias
v4: diameter 26, hole 12, Top Layer to Bottom Layer, 2 vias
v5: diameter 24, hole 12, Top Layer to Bottom Layer, 2 vias
v6: diameter 31.5, hole 15.75, Top Layer to Bottom Layer, tented top, 1 vias

## Nets (pads, with @x,y where several pads share a name; then routed paths per layer and width w, separated by ;. In a path a pad name is that pad's centre, name@x,y a point inside that pad or via, vN(x,y) a via of type N, cw(c..) or ccw(c..) an arc to the next point about the centre after c; other vN are vias at no path point)
ANTENNA: ANT1.1 C38.2 | length 275
  Top Layer w19.7: ANT1.1 198.92,-711.08 200,-710 C38.2
BLE_INT: R21.2 U4.18 | length 188.3
  Top Layer w8: R21.2 -44.41,-103.13 U4.18
BLE_UART_RX: R22.2 U4.19 | length 199.1
  Top Layer w8: R22.2 40,-160 81.13,-118.87 U4.19
BLE_UART_TX: R23.2 U4.20 | length 209
  Top Layer w8: R23.2 19,-202 86.38,-134.62 U4.20
CC2538/N\R\F\5\1\8\2\2\: C36.2 U3.50 U7.6 U8.2 | length 1143.7
  Top Layer w8: U3.50 -129.81,-154.81 v1(-125,-150) ; U7.6 171.93,-435 245,-435 255,-445 255,-465 U8.2 v1(380,-465)
  Bottom Layer w8: v1(-125,-150) -166,-191 -166,-394 -130,-430 345,-430 v1(380,-465)
CC2538_RESETN: R3.2 R8.2 | length 1060.1
  Top Layer w8: v1(-645,195) -645,155 -625,135 -625,-50 v1(-630,-50) ; v1(-615,-320) R8.2
  Bottom Layer w8: v1(-645,195) -590,250 -202.72,250 R3.2 ; v1(-630,-50) -630,-305 v1(-615,-320)
CC2538_RF_N: B2.3 U3.38 | length 82.9
  Top Layer w8: U3.38 -294.44,-335.13 -293.65,-335.91 -293.65,-375.5 B2.3
CC2538_RF_P: B2.4 U3.37 | length 83.6
  Top Layer w8: B2.4 -311.65,-375.5 -311.65,-343.37 -314.13,-340.9 U3.37
DW_IRQN: P4.1 R18.2 | length 1063.3
  Top Layer w8: v1(-1210,-175) -1175,-210 -710,-210 -650,-270 -650,-330 -615,-365 R18.2
  Bottom Layer w8: P4.1 -1265,75 -1210,20 v1(-1210,-175)
DW_RSTN: P4.3 U3.30 | length 1222.1
  Top Layer w8: v1(-1250,-175) -1200,-225 -720,-225 -665,-280 -665,-340 -615,-390 -497.33,-390 -451.92,-344.59 U3.30
  Bottom Layer w8: P4.3 -1265,25 -1250,10 v1(-1250,-175)
DW_WAKEUP: P4.4 U3.31 | length 1498.2
  Top Layer w8: v1(-1495,25) -1495,-170 -1425,-240 -730,-240 -680,-290 -680,-349.8 -619.8,-410 -497.53,-410 -432.24,-344.71 U3.31
  Bottom Layer w8: v1(-1495,25) P4.4
F\L\A\S\H\_\C\S\: U3.11 U6.1 | length 311.7
  Top Layer w8: U6.1 -439,260 -412.87,233.87 -412.87,126.87 -413,126.73 -413,-9.68 U3.11
F\L\A\S\H\_\H\O\L\D\: R25.2 U3.8 U6.7 | length 915.3
  Top Layer w8: U6.7 -389,633 -359.72,662.28 R25.2 -277.28,662.28 -245,630 -245,265 -279,231 -329,231 -353.5,206.5 U3.8
F\L\A\S\H\_\W\P\: R26.2 U3.9 U6.3 | length 374.5
  Top Layer w8: U3.9 -372.87,-9.81 -372.87,225.13 -339,259 U6.3 -359.51,290.49 v1(-360,290)
  Bottom Layer w8: R26.2 -375,305 v1(-360,290)
GND: B1.A2 B2.2 B2.5 B2.6 C1.2 C2.2 C3.2 C4.2 C5.2 C6.2 C7.2 C8.2 C9.2 C10.2 C11.2 C12.2 C13.2 C14.2 C15.2 C16.2 C17.2 C18.2 C19.2 C20.2 C21.2 C22.2 C23.2 C24.2 C25.2 C26.2 C27.2 C28.2 C29.2 C30.2 C31.2 C32.2 C33.2 C34.2 C35.2 C36.1 C39.2 C41.1 C42.1 C43.2 C44.1 C45.1 C46.2 J1.5 J1.6 P1.3 P1.4 P2.7 P3.1 P3.2 P3.7 P3.8 P4.7 P5.5 R1.2 R9.2 U1.2 U1.3 U1.11 U2.3 U2.7 U3.1 U3.57 U4.13 U4.33 U4.34 U4.49 U5.4 U5.17 U5.20 U5.24 U5.26 U5.33 U6.4 U6.9 U7.2 U8.3 Y3.2 Y3.4 Y4.2 Y4.4 Y5.6 | length 2148.4
  Top Layer w8: U3.57 v2(-322,-143) v2(-278.69,-99.69) v2(-235.39,-56.39) -216.84,-37.84 -216.84,-11.27 U3.1 ; B2.6 B2.5 B2.2 ; U6.4 -265.49,290.49 v1(-265,290) ; v1(-250,175) -250,91.57 C29.2 ; C28.2 -107.28,82.28 v1(-105,80) ; C7.2 v1(-80,-5) ; C32.2 C31.2 -18.28,-240 15,-240 v1(20,-235) ; Y5.6 22.01,307.99 40,290 v1(40,285) ; U4.33 276.37,-150.37 292.12,-166.12 U4.34 ; v1(320,-335) C22.2 ; v1(380,5) 382.72,7.72 C18.2 ; C34.2 v1(570,-115) ; C33.2 v1(570,-20) ; P5.5 v1(800,-145)
  Top Layer w12: v1(-500,-445) -451.18,-445 Y4.4 ; U1.11 U1.3 U1.2
  Bottom Layer w8: C30.2 -582.72,-280 C15.2 -557.72,-232.28 v1(-575,-215) ; C13.2 -567.72,27.28 -550,45 C11.2 -462.72,67.28 -450,80 v1(-393,80) ; v1(-500,-445) -497.28,-447.72 C9.2 -405,-447.72 C8.2 -333.31,-417.72 C10.2 ; C35.2 -372.28,667.72 -360,680 v1(-360,685) ; C12.2 -225.65,-418.37 C14.2 -202.72,-417.72 v1(-190,-405) ; C23.2 -177.28,315 v1(-155,315) ; C17.2 -102.28,-5 v1(-80,-5) ; U5.26 21.21,303.79 v1(40,285) ; U5.20 104.44,428.84 C27.2 ; v1(115,-255) C20.2 ; C46.2 172.72,177.28 v1(175,175) ; C19.2 524,-161 v1(570,-115)
  Bottom Layer w12: P2.7 v4(1490,-75)
  other v1: 135,-530 520,-500 -225,-490 -165,-490 -120,-490 -60,-490 -10,-490 210,-455 50,-450 575,-445 -125,-400 -75,-400 90,-400 210,-400 -29,-394 295,-390 630,-375 20,-345 70,-310 140,-310 670,-300 955,-235 1055,-235 1155,-235 1255,-235 1355,-235 -1275,-215 -1360,-210 -1050,-185 -1445,-155 -1285,-150 -1440,220 -1340,220 -1240,220 -1140,220 -1040,220 150,325 -175,485 395,510 445,510 495,510 545,510 395,555 445,555 495,555 395,600 445,600
  other v2: -451.92,-272.92 -365.31,-272.92 -278.69,-272.92 -408.61,-229.61 -322,-229.61 -235.39,-229.61 -451.92,-186.31 -365.31,-186.31 -278.69,-186.31 -408.61,-143 -235.39,-143 -451.92,-99.69 -365.31,-99.69 -408.61,-56.39 -322,-56.39 -407.31,359.39 -320.69,359.39 -364,402.69 -407.31,446 -320.69,446 -364,489.31 -407.31,532.61 -320.69,532.61
  other v3: 172.04,-175.96 258.65,-175.96 215.35,-132.65 301.96,-132.65 172.04,-89.35 258.65,-89.35 215.35,-46.04 301.96,-46.04
  other v6: -28,419
JTAG_TCK: P6.1 U3.47 | length 1003.7
  Top Layer w8: U3.47 -189.13,-213.1 -133.1,-213.1 v1(-128,-208)
  Bottom Layer w8: v1(-128,-208) -53,-283 598.06,-283 P6.1
JTAG_TMS: P6.6 U3.46 | length 1208.4
  Top Layer w8: U3.46 -146.45,-233.55 v1(-146,-233.1)
  Bottom Layer w8: v1(-146,-233.1) -136.9,-233.1 0,-370 540,-370 726.42,-183.58 843.15,-183.58 P6.6
LED_DR0: P3.4 U3.23 | length 741.7
  Top Layer w8: P3.4 -1085,50 -915,-120 -710,-120 -635.82,-194.18 U3.23
LED_DR1: P3.3 U3.25 | length 984
  Top Layer w8: P3.3 -1240,50 -1190,0 -1075,0 -930,-145 -710.2,-145 -619.2,-236 -498.18,-236 U3.25
LED_DR2: P3.6 U3.26 | length 724.8
  Top Layer w8: P3.6 -1133.78,-55 -1060,-55 -950,-165 -710,-165 -621.76,-253.24 U3.26
LED_DR3: P3.5 U3.27 | length 955.4
  Top Layer w8: P3.5 -1270,-50 -1215,-105 -1065,-105 -985,-185 -710,-185 -622.08,-272.92 U3.27
NET_CTRL: P4.5 U3.22 | length 1134.4
  Top Layer w8: v1(-1100,100) -905,-95 -695,-95 -615.5,-174.5 U3.22
  Bottom Layer w8: P4.5 -1345,-25 -1360,-10 -1360,95 -1355,100 v1(-1100,100)
NET_INT: P4.6 R13.1 | length 1322.9
  Top Layer w8: R13.1 v1(-325,175)
  Bottom Layer w8: P4.6 -1410,-25 -1385,0 -1385,130 -1345,170 -330,170 v1(-325,175)
NetB1_B1: B1.B1 C37.1 | length 49.8
  Top Layer w18: C37.1 253.84,-353.87 B1.B1
NetB1_C2: B1.C2 C39.1 U4.30 | length 100.9
  Top Layer w8: C39.1@212.66,-288.62 B1.C2 229.13,-273.75 U4.30
NetB2_1: B2.1 C40.1 | length 132.5
  Top Layer w18: B2.1 -142.96,-445.24 C40.1
NetC4_1: C4.1 U2.2 | length 56.9
  Top Layer w12: U2.2 297,499.47 C4.1@302.47,494
NetC7_1: C7.1 C9.1 U3.32 U3.56 | length 772.3
  Top Layer w8: v1(-415,-380) -415,-321.63 U3.32 ; v1(-190,0) -190,-35.83 U3.56 -157.43,-5 C7.1
  Bottom Layer w8: C9.1 v1(-415,-380) -415,-330 -405,-320 -220,-320 -190,-290 v1(-190,0)
NetC19_1: C19.1 U4.39 | length 85.2
  Top Layer w8: U4.39 378.88,-166.12 v1(390,-155)
  Bottom Layer w8: v1(390,-155) 423.28,-155 C19.1
NetC20_1: C20.1 U4.29 | length 74.2
  Top Layer w8: v1(209,-263) 213.38,-258.62 U4.29
  Bottom Layer w8: C20.1 201,-255 v1(209,-263)
NetC24_1: C24.1 C27.1 FB1.1 U5.19 | length 229.2
  Bottom Layer w12: U5.19 C24.1@167,448.53 ; FB1.1 154.72,460.81 C24.1@167,448.53 ; C24.1 C24.1@167,448.53
NetC30_1: C30.1 R7.2 R8.1 U3.28 | length 169.5
  Top Layer w8: R8.1 -504.36,-320 v1(-498.18,-313.82) U3.28
  Bottom Layer w8: R7.2 C30.1 -504.36,-320 v1(-498.18,-313.82)
NetC31_1: C31.1 U3.45 Y1.2 | length 138.6
  Top Layer w8: U3.45 -112.89,-253.24 Y1.2 -55.72,-242 C31.1
NetC32_1: C32.1 R15.1 U3.44 Y1.1 | length 182
  Top Layer w8: U3.44 -114.04,-272.92 Y1.1 -55.72,-285.31 C32.1 R15.1
NetC33_1: C33.1 R24.1 U4.46 Y2.2 | length 214.6
  Top Layer w8: U4.46 410.91,-55.88 445,-21.79 Y2.2 503.07,-15.79 507.28,-11.57 R24.1
NetC34_1: C34.1 U4.45 Y2.1 | length 179.4
  Top Layer w8: U4.45 413.37,-71.63 445,-103.26 Y2.1 C34.1@506.5,-114.21
NetC37_2: C37.2 U7.1 | length 53.2
  Top Layer w18: U7.1 213.62,-358.66 C37.2
NetC38_1: C38.1 U7.5 | length 100
  Top Layer w18: U7.5 140,-470 165,-495 197.72,-495 C38.1
NetC40_2: C40.2 U7.3 | length 257.5
  Top Layer w18: C40.2 -20,-445 66.34,-358.66 U7.3
NetC41_2: C41.2 U4.37 Y3.1 | length 213.9
  Top Layer w6: U4.37 377.4,-223.84 454.82,-223.84 482.59,-251.61 Y3.1 535.82,-256.46 C41.2
NetC42_2: C42.2 U4.38 Y3.3 | length 243.7
  Top Layer w6: U4.38 423.74,-181.87 Y3.3 431.41,-168.59 445,-155 525,-155 537.28,-167.28 C42.2
NetC44_2: C44.2 U3.34 Y4.1 | length 254.4
  Top Layer w6: C44.2 -490.35,-487.64 Y4.1 -437.64,-487.64 -419.16,-469.16 -419.16,-412.17 -373.18,-366.19 U3.34
NetC45_2: C45.2 U3.35 Y4.3 | length 202.7
  Top Layer w6: U3.35 -353.5,-363.5 -390,-400 -390,-440.91 Y4.3 -388.57,-442.36 -350,-480.93 C45.2
NetD1_2: D1.2 R1.1 | length 40
  Top Layer w8: R1.1 D1.2
NetD2_1: D2.1 R10.2 | length 33.9
  Top Layer w8: D2.1@-444,85.41 R10.2
NetD2_2: D2.2 U3.12 | length 64.5
  Top Layer w8: D2.2 -432.24,38.21 U3.12
NetD3_1: D3.1 R11.2 | length 33.9
  Top Layer w8: D3.1@-485,85.41 R11.2
NetD3_2: D3.2 U3.13 | length 73.3
  Top Layer w8: D3.2 -451.92,16.9 U3.13
NetD4_1: D4.1 R12.2 | length 33.9
  Top Layer w8: D4.1@-526,85.41 R12.2
NetD4_2: D4.2 U3.14 | length 82.1
  Top Layer w8: D4.2 -525.65,43.92 U3.14
NetP5_2: P5.2 P6.5 | length 178.4
  Top Layer w8: P5.2 v1(935,-70)
  Bottom Layer w8: P6.5 920,-85 v1(935,-70)
NetP5_4: P5.4 P6.2 | length 332.3
  Top Layer w8: P5.4 v1(935,-120)
  Bottom Layer w8: P6.2 762.17,-120 v1(935,-120)
NetR3_1: R3.1 U5.32 | length 81.7
  Bottom Layer w8: R3.1 -129.72,270 -96.9,302.82 U5.32
NetR9_1: R9.1 U3.42 | length 63.3
  Top Layer w8: U3.42 -215,-319.88 -215,-357.72 R9.1
NetR13_2: R13.2 U3.7 | length 106.1
  Top Layer w8: U3.7 -333.81,83.47 R13.2
NetR14_2: R14.2 U3.20 | length 267.6
  Top Layer w8: R14.2 -700,-30 -594.87,-135.13 U3.20
NetR16_2: R16.2 U3.21 | length 307.9
  Top Layer w8: R16.2 -597.72,-155 -498.37,-155 U3.21
NetR17_2: R17.2 U3.6 | length 116.8
  Top Layer w8: U3.6 -314.44,-9.81 -314.44,57.84 R17.2
NetR18_1: R18.1 U3.29 | length 104.9
  Top Layer w8: R18.1 -500,-365 -471.61,-336.61 U3.29
NetR19_2: R19.2 U3.19 | length 229.1
  Top Layer w8: R19.2 -655,-55 -594.56,-115.44 U3.19
NetR20_1: R20.1 U3.52 | length 111.2
  Top Layer w8: U3.52 -189.13,-115.76 -141.46,-115.76 -101.71,-76 R20.1
NetR21_1: R21.1 U3.51 | length 101.5
  Top Layer w8: U3.51 -141.03,-135.13 -123.91,-118 R21.1
NetR22_1: R22.1 U3.49 | length 100.7
  Top Layer w8: U3.49 -189.13,-174 -108.72,-174 R22.1
NetR23_1: R23.1 U3.48 | length 100.5
  Top Layer w8: U3.48 -142.47,-194.18 -136.28,-188 -106.72,-188 R23.1@-95.72,-199
NetR27_2: R27.2 Y5.1 | length 58.6
  Top Layer w8: Y5.1 135.28,182.01 R27.2
NetU3_16: U3.16 U5.30 | length 859.9
  Top Layer w8: v1(-520,195) -540,195 -555,180 -555,-28 -526.61,-56.39 U3.16
  Bottom Layer w8: v1(-520,195) -520,200 -500,220 -115.89,220 -57.53,278.36 U5.30
NetU3_17: U3.17 U5.2 | length 917.7
  Top Layer w8: U3.17 -498.18,-75.76 -554.24,-75.76 -580,-50 -580,190 -500,270 v1(-495,270)
  Bottom Layer w8: v1@-495,265 -240,265 -220,285 -220,350 v1(-180,390) -159.79,369.79 U5.2
NetU3_18: U3.18 U5.31 | length 969.8
  Top Layer w8: v1(-605,195) -605,-55 -564.24,-95.76 U3.18
  Bottom Layer w8: v1(-605,195) -566,234 -136,234 -77.21,292.79 U5.31
NRF51822_P0.22: P5.3 U4.41 | length 471.3
  Top Layer w8: U4.41 375.38,-134.62 385,-125 v1(390,-125) ; v1(615,-70) 665,-120 P5.3
  Bottom Layer w8: v1(390,-125) 515,-125 570,-70 v1(615,-70)
NRF51822_P0.25: P5.6 U4.44 | length 987.3
  Top Layer w8: U4.44 382.38,-87.38 v1(390,-95) ; P5.6 885,-170 v1(910,-195)
  Bottom Layer w8: v1(390,-95) 525,-95 645,25 915,25 965,-25 965,-160 930,-195 v1(910,-195)
NRF51822_RF_N: B1.C3 U4.31 | length 40.2
  Top Layer w8: B1.C3 244,-256.67 244.87,-255.8 U4.31
NRF51822_RF_P: B1.A3 U4.32 | length 41.1
  Top Layer w8: U4.32 260.62,-253.61 263.68,-256.67 B1.A3
RTC_CLKOUT: R15.2 R24.2 Y5.3 | length 1223.8
  Top Layer w8: R15.2 -8.65,-328.65 50,-270 v1(50,-225) ; v1(40,-10) 40,220 65,245 Y5.3 ; R24.2 v1(575,25)
  Bottom Layer w8: v1(50,-225) 50,-20 v1(40,-10) 75,25 v1(575,25)
RTC_INT: R17.1 Y5.7 | length 373.1
  Top Layer w8: v1(-285,175) -280,170 R17.1 ; v1(-100,200) -88.04,200 -11.54,276.5 Y5.7
  Bottom Layer w8: v1(-285,175) -260,200 v1(-100,200)
SPI_BLE_CS: R20.2 U4.17 | length 186.8
  Top Layer w8: R20.2 -47.91,-87.38 U4.17
SPI_CSN_DW: P2.6 U3.53 | length 1603.5
  Top Layer w8: U3.53 v1(-152.76,-95.76)
  Bottom Layer w8: v1(-152.76,-95.76) -152.51,-96 -106,-96 50,60 1020,60 1105,-25 P2.6
SPI_CSN_NET: P2.5 U3.54 | length 1743.4
  Top Layer w8: U3.54 -189.13,-75.76 -144.47,-75.76 -144.23,-76 v1(-131,-76)
  Bottom Layer w8: v1(-131,-76) -122.72,-76 38.28,85 1030,85 1115.43,-0.43 1347.5,-0.43 1372.06,-25 P2.5
SPI_MISO: P2.3 R19.1 U4.4 U6.2 Y5.5 | length 3272.1
  Top Layer w8: R19.1 v1(-655,95) -665,105 -665,210 -558.76,316.24 -414.75,316.24 U6.2 ; Y5.5 122.01,307.99 v1(295,135) 295,70 276.37,51.37 U4.4
  Bottom Layer w8: v1(-655,95) -620,130 v1@290,130 ; v1(295,135) 345,185 1410,185 1495,100 1495,45 1475,25 P2.3
SPI_MOSI: P2.4 R14.1 U4.6 U6.5 Y5.10 | length 3537.7
  Top Layer w8: R14.1 v1(-700,150) -700,210 v1(-565,345) ; v1(-310,600) -308.49,601.51 U6.5 ; Y5.10 0,178.7 v1(0,150) ; v1(200,150) 200,95 244.87,50.13 U4.6
  Bottom Layer w8: v1(-700,150) v1(0,150) v1(200,150) 250,150 305,205 1430,205 1515,120 1515,35 1480,0 1375,0 1350,25 P2.4 ; v1(-565,345) v1(-310,600)
SPI_RTC_CS: U3.5 Y5.8 | length 523.4
  Top Layer w8: U3.5 v1(-294.44,24.44) ; v1(-50,25) -50,206.54 -11.54,245 Y5.8
  Bottom Layer w8: v1(-294.44,24.44) -293.88,25 v1(-50,25)
SPI_SCK: P2.1 R16.1 U4.5 U6.6 Y5.4 | length 3380.3
  Top Layer w8: R16.1 v1(-745,70) -745,225 v1(-625,345) ; v1(-360,600) -358.49,601.51 U6.6 ; Y5.4 84.8,275 125,275 260.62,139.38 v1(260.62,110) U4.5
  Bottom Layer w8: v1(-745,70) -640,70 -600,110 v1(260.62,110) 320,110 335,125 1030,125 1105,50 1416.58,50 P2.1 ; v1(-625,345) -624.37,345 -369.37,600 v1(-360,600)
SWDCLK: P6.3 U4.24 | length 771.8
  Top Layer w8: v1(90,-205) 97.39,-197.61 U4.24
  Bottom Layer w8: v1(90,-205) 530,-205 655,-80 655,-45 683.9,-16.1 P6.3
SWDIO: P6.4 U4.23 | length 997
  Top Layer w8: v1(90,-175) 96.87,-181.87 U4.23
  Bottom Layer w8: v1(90,-175) 80,-175 70,-185 70,-213.28 81.72,-225 535,-225 669,-91 669,-66 680,-55 833.94,-55 P6.4
USB_FTDI_N: R2.1 U5.15 | length 83.3
  Bottom Layer w8: U5.15 21.21,558.21 v1(32,569) R2.1
USB_FTDI_P: R4.1 U5.14 | length 84.9
  Bottom Layer w8: R4.1 v1(-13,569) 1.53,554.47 U5.14
USB_MCU_N: C29.1 R5.2 U3.3 | length 178.5
  Top Layer w8: U3.3 -255.07,20.38 -232.46,43 -205,43 -195,53 -195,72 C29.1 -205.28,105.98 -209,109.69 R5.2
USB_MCU_P: C28.1 R6.2 U3.2 | length 177.5
  Top Layer w8: U3.2 -235.39,14.61 -225,25 -197.54,25 -177,45.54 -177,75 C28.1 -169.72,106.98 -166,110.69 R6.2
USB_N: J1.2 R2.2 R5.1 | length 862.5
  Top Layer w8: R5.1 -209,168.87 -225,184.87 -225,625.46 v1(-200.46,650) ; J1.2 22.59,669.59 v1(27,674)
  Bottom Layer w8: v1(-200.46,650) -135,650 -87,698 1.94,698 v1@25.94,674 ; v1(27,674) 27,636.72 R2.2
USB_P: J1.3 R4.2 R6.1 | length 795
  Top Layer w8: v1(-200,615) -207,608 -207,210.87 -166,169.87 R6.1 ; v1(-8,674) -3,669 J1.3
  Bottom Layer w8: v1(-200,615) -180,635 -124.54,635 -79.54,680 -14,680 v1(-8,674) -8,636.72 R4.2
VCC_3.3_FTDI: C23.1 D1.1 U3.4 U5.1 U5.16 | length 1088.7
  Top Layer w8: v1(-286,52) -274.44,40.44 -274.44,-9.81 U3.4 ; v1(-75,50) -75,120 -125,170 v4(-125,325) -126.43,326.43 -126.43,487.9 -95.32,519 v5(67,519) D1.1
  Bottom Layer w8: v1(-286,52) -77,52 v1(-75,50) ; C23.1 -177.61,350.1 U5.1 -126.43,326.43 v4(-125,325) ; U5.16 65.43,517.43 v5(67,519)
VCC_3.3_MAIN: C6.1 C8.1 C10.1 C11.1 C12.1 C13.1 C14.1 C15.1 C16.1 C17.1 C18.1 C21.1 C22.1 C35.1 C46.1 P4.2 P5.1 R7.1 R10.1 R11.1 R12.1 R25.1 R26.1 R27.1 U1.6 U1.10 U3.10 U3.15 U3.24 U3.33 U3.36 U3.39 U3.40 U3.41 U3.43 U3.55 U4.1 U4.12 U4.35 U4.36 U6.8 U8.5 Y5.2 | length 1470.2
  Top Layer w8: v1(-531,-216) -528.87,-213.87 U3.24 ; R12.1 R11.1 ; U3.15 v1(-498.18,-15.82) ; v1(-485,195) R11.1 ; R10.1 R11.1 ; U6.8 v1(-439,632) ; v1(-395,-355) -392.87,-352.87 U3.33 ; U3.10 v1(-392.87,24.13) ; U3.36 -333.81,-354.69 v1(-333.5,-355) ; R25.1 v1(-282.28,697.72) ; U3.39 -274.76,-350.24 v1(-270,-355) -255.07,-340.07 U3.40 ; U3.41 -235.39,-354.61 v1(-235,-355) ; U3.43 -189.13,-324.13 v1(-190,-325) -142.72,-325 C16.1 ; U3.55 -155.61,-56.39 v1(-153.23,-54) ; Y5.2 v1(111.26,213.5) 139.21,213.5 R27.1 ; C21.1@122.72,50 122.72,7.28 v1(125,5) 126.83,3.17 U4.12 ; U4.35 307.87,-260.15 C22.1 323.61,-268.67 U4.36 330.17,-225.17 v1(360,-255) ; U4.1@323.61,8.61 U4.1 v1(343.17,3.17) 343.17,45.89 C18.1 ; U8.5 423.31,-411.69 v1(425,-410) ; P5.1 v1(800,-95)
  Bottom Layer w8: v1(-585,-435) -582.72,-432.72 R7.1 ; C13.1 -504,-10 v1(-498.18,-15.82) ; v1(-531,-216) -522.28,-224.72 C15.1 ; v1(-470,290) -455,305 R26.1 ; v1(-439,632) -426,645 C35.1 ; C11.1 -413.73,45 v1(-392.87,24.13) ; v1(-395,-355) -375,-375 C8.1 ; v1(-333.5,-355) -333.5,-382.09 C10.1 ; C12.1 -272.65,-357.65 v1(-270,-355) ; v1(-235,-355) -235,-372.28 C14.1 ; v1(-153.23,-54) -153.23,-20.51 C17.1 ; v1(111.26,213.5) 139.21,213.5 C46.1
  other v1: -1530,85 -1530,135 -1485,135 -1440,135 225,275 275,275 225,325 275,325 225,375 275,375 325,375
VCC_LED_3.3: C1.1 P1.5 P1.6 P1.7 P1.8 U1.1 U1.4 | length 99.6
  Top Layer w12: U1.4 522.32,348.68 547,324 C1.1
VCC_USB_3.3: C3.1 C5.1 U1.5 U2.1
VCC_USB_5: C2.1 C25.1 C26.1 FB1.2 J1.1 U2.4 U2.6 | length 209.4
  Top Layer w12: J1.1 48.18,592.82 v5(72,569)
  Bottom Layer w12: C26.1 72,611.28 v5(72,569) FB1.2 119.28,614 C25.1
VCONT2: C43.1 U7.4 U8.4 | length 572.7
  Top Layer w8: C43.1 100,-490 114.41,-475.59 U7.4 114.41,-425.59 120,-420 370,-420 400,-390 445,-390 470,-415 470,-460 439.41,-490.59 U8.4
VSYS: P1.1 P1.2 P2.2
  other v1: 1225,110 1280,110 1225,150 1280,150
pads on no net: ANT1. J1.4 P2.8 P4.8 P5.0 U1.7 U1.8 U1.9 U2.5 U4.2 U4.3 U4.7 U4.8 U4.9 U4.10 U4.11 U4.14 U4.15 U4.16 U4.21 U4.22 U4.25 U4.26 U4.27 U4.28 U4.40 U4.42 U4.43 U4.47 U4.48 U5.3 U5.5 U5.6 U5.7 U5.8 U5.9 U5.10 U5.11 U5.12 U5.13 U5.18 U5.21 U5.22 U5.23 U5.25 U5.27 U5.28 U5.29 U8.1 Y5.9

## Polygon pours and split planes (outlines as drawn)
VCC_3.3_MAIN on Top Layer "Top Layer-No Net 1" (solid, pour order 19): 400,405 400,250 195,250 195,405
VCC_USB_3.3 on Top Layer "Top Layer-No Net 1" (solid, pour order 14): 285,570 285,460 565,460 565,360 470,360 470,425 240,425 240,570
VCC_USB_3.3 on Top Layer "Top Layer-No Net" (solid, pour order 13): 282,569 282,474 567,474 567,359 477,359 477,419 227,419 227,569
VCC_3.3_MAIN on Top Layer "Top Layer-No Net" (solid, pour order 15): 397,399 397,259 197,259 197,399
VCC_USB_5 on Top Layer "Top Layer-No Net" (solid, pour order 12): 37,594 37,689 37,704 293,704 293,662 344,662 344,609 282,609 217,609 217,664 82,664 82,594
GND on Top Layer "Top Layer-No Net 1" (solid, pour order 18): -1600.36,-275 -1600.36,275 -750.36,275 cw(c-0.36,0) 749.64,275 1599.64,275 1599.64,-275 749.64,-275 cw(c-0.36,0) -750.36,-275
VSYS on Top Layer "Top Layer-No Net 1" (solid, pour order 21): 1075,190 1075,85 1421.71,85 1421.71,190
VCC_LED_3.3 on Top Layer "Top Layer-No Net 1" (solid, pour order 22): 1425,-195 1075,-195 1075,-90 825,160 625,160 625,250 475,250 475,300 675,300 675,215 865,215 1090,-10 1425,-10
VCC_3.3_MAIN on VCC_3.3_MAIN "Top Layer-No Net 1" (solid, pour order 17): -1601.16,-272.83 -1601.16,277.17 -751.16,277.17 cw(c-1.16,2.17) 748.84,277.17 1598.84,277.17 1598.84,-272.83 748.84,-272.83 cw(c-1.16,2.17) -751.16,-272.83
GND on GND "Top Layer-No Net 1" (solid, pour order 16): -1600,-275 -1600,275 -750,275 cw(c0,0) 750,275 1600,275 1600,-275 750,-275 cw(c0,0) -750,-275
GND on Bottom Layer "Top Layer-No Net 1" (solid, pour order 29): 200,270 -205,270 -205,800 200,800
GND on Bottom Layer "Top Layer-No Net 1" (solid, pour order 27): -1265,-40 -1265,-250 -1530,-250 -1530,-40
VCC_3.3_MAIN on Bottom Layer "Top Layer-No Net 1" (solid, pour order 25): -1390,45 -1560,45 -1560,170 -1390,170
VSYS on Bottom Layer "Top Layer-No Net 1" (solid, pour order 20): 1185,175 1185,50 1365,50 1365,175 1420,175

## Keep-outs
Keep-Out Layer:
  the board outline again, w10

## Other copper
Top Layer:
  pour cut-out: -590,-540 595,-540 595,-800 -590,-800
GND:
  pour cut-out: -590,-540 595,-540 595,-800 -590,-800
VCC_3.3_MAIN:
  pour cut-out: -590,-540 595,-540 595,-800 -590,-800

## Silkscreen, mask and mechanical layers (free items; w line width, h text height)
Top Overlay:
  region: -1028.35,-161.6 -969.16,-161.6 -969.16,-130 -981.2,-130 -981.2,-101.41 -951.85,-142.54 -949.85,-142.54 -920,-101.41 -920,-130 -932.04,-130 -932.04,-161.6 -872.85,-161.6 -872.85,-130 -884.89,-130 -884.89,-82.35 -872.85,-82.35 -872.85,-50.74 -919.75,-50.74 -949.85,-92.38 -951.35,-92.38 -981.45,-50.74 -1028.35,-50.74 -1028.35,-82.35 -1016.81,-82.35 -1016.81,-130 -1028.35,-130
  text "VCC" at 640,-85 h30
  text "SWDIO" at 875,-85 h30
  text "SWCLK" at 875,-135 h30
  text "GND" at 640,-190 h30
  text "Control Plane" at -1020,-200 h30
  text "To LED" at -1335,-250 h30
  text "Kuo, 02 '15" at -1020,-250 h30
  text "To LED" at 1165,-255 h30
Bottom Overlay:
  text "To Decawave" at -1225,-165 h30
  text "To Decawave" at 1530,-165 h30